# Altium PCB cube.PcbDoc
Units mil, origin at the board's own origin, x right, y up, seen from the top; angles counter-clockwise.
Board outline 3935 x 2100 mil, 2 copper layers (Top Layer, Bottom Layer); 65 components, 66 nets, 289 pads, 196 vias.
Unrouted connection lines stored in the file: 1.
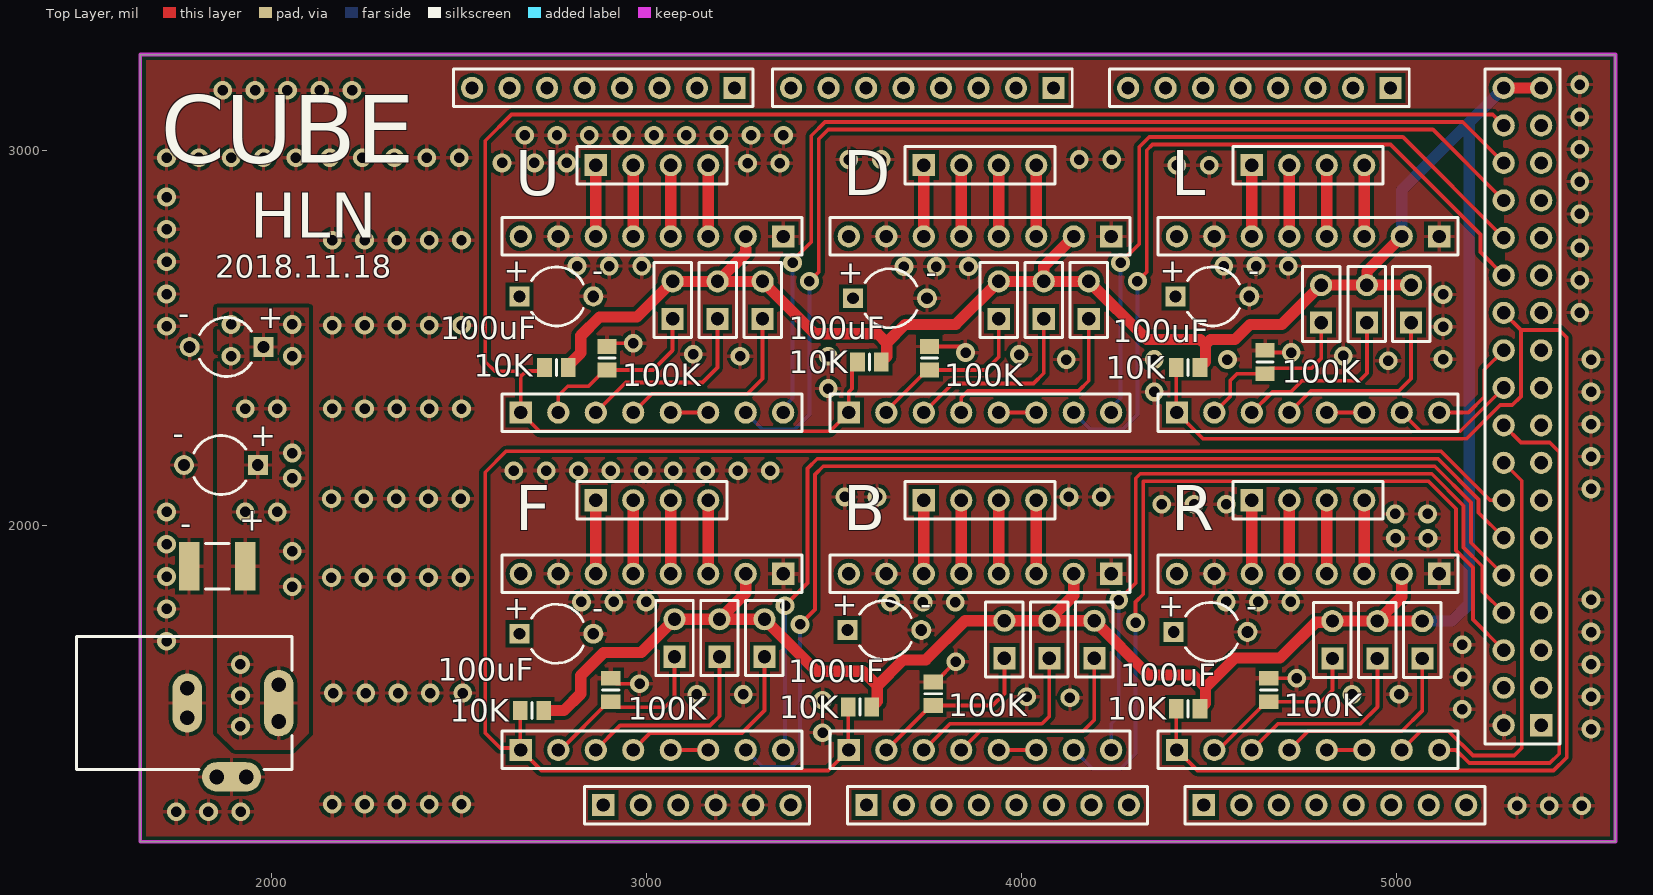
[diagram p0: Top Layer view]
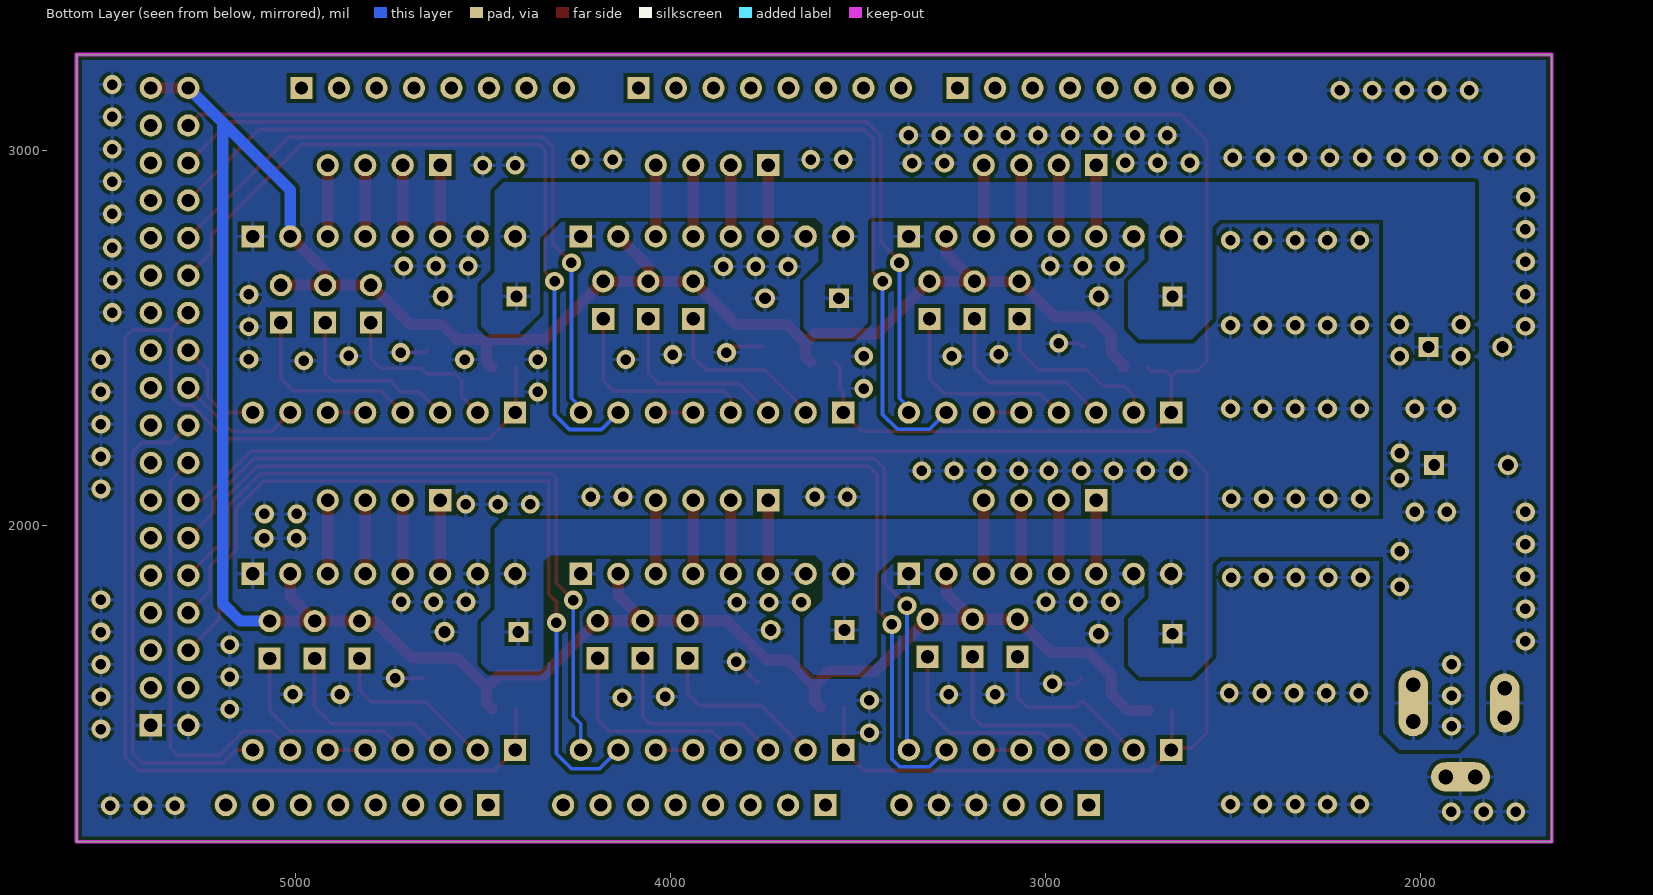
[diagram p1: Bottom Layer view, seen from below]

## Layer stack, top to bottom
Top Solder: solder mask 0.4, Solder Resist, Dk 3.5
Top Layer: signal copper 1.4
Dielectric 1: dielectric 12.6, FR-4, Dk 4.8
Bottom Layer: signal copper 1.4
Bottom Solder: solder mask 0.4, Solder Resist, Dk 3.5

## Board outline
1650,1155 1650,3255 5585,3255 5585,1155

## Design rules (kind name [scope] priority, off if disabled: settings)
Clearance [All] p1: gap=10 ignorepadtopadclearanceinfootprint=FALSE except(0: Arc-Hole Track-Hole SMDPad-Hole THPad-Hole Via-Hole Fill-Hole Poly-Hole Region-Hole Text-Hole)
PolygonConnect [All] p1: connectstyle=Relief reliefconductorwidth=10 reliefentries=4 polygonreliefangle="90 Angle" airgapwidth=10
RoutingVias [All] p1: holewidth=28 width=50 viastyle="Through Hole" minholewidth=28 minwidth=50 maxholewidth=28 maxwidth=50
SolderMaskExpansion [All] p1: expansion=4
Width [All] p1: maxlimit=50 minlimit=10 preferedwidth=10
30 further rules are at their usual default settings.

## Classes and differential pairs
component class cube: C4 C5 C7 C9 J1 P1 P2 P3 P4 P5 P7 P8 P9 P11 P13 P14 P15 P17 P24 P25 P27 P29 P34 P35 P39 P40 P41 P42 P43 RT1 RT2 RT8 RT10 RT11 RT12

## Components (designator, comment, footprint, x,y, rotation, side; value= is the part's Value field where it differs from the comment)
C1 "" CAPR5-4X5 1865,2160 r180 top value=100pF
C2 "" 1812 1855,1890 r180 top value=100pF
C3 "" CAPR5-4X5 2760,2610 r0 top value=100pF
C4 "" CAPR5-4X5 3650,2605 r0 top value=100pF
C5 "" CAPR5-4X5 4510,2610 r0 top value=100pF
C6 "" CAPR5-4X5 1880,2475 r180 top value=100pF
C7 "" CAPR5-4X5 2760,1710 r0 top value=100pF
C8 "" CAPR5-4X5 3635,1720 r0 top value=100pF
C9 "" CAPR5-4X5 4505,1715 r0 top value=100pF
J1 "" KLD-0202 1480,1525 r0 top
P1 "" HDR1X4 2865,2960 r0 top
P2 "" HDR1X4 3740,2960 r0 top
P3 "" HDR1X4 4615,2960 r0 top
P4 "" HDR1X8 3235,3166 r180 top
P5 "" HDR1X6 2885,1253 r0 top
P6 "" HDR1X8 3365,2770 r180 top
P7 "" HDR1X8 4240,2770 r180 top
P8 "" HDR1X8 5115,2770 r180 top
P9 "" HDR1X8 2665,2300 r0 top
P10 "" HDR1X8 3540,2300 r0 top
P11 "" HDR1X8 4415,2300 r0 top
P12 "" HDR1X8 3587,1253 r0 top
P13 "" HDR1X8 4086,3166 r180 top
P14 "" HDR1X2 3310,2550 r90 top
P15 "" HDR1X2 4180,2550 r90 top
P16 "" HDR1X2 5040,2540 r90 top
P17 "" HDR1X2 3070,2550 r90 top
P18 "" HDR1X2 3940,2550 r90 top
P19 "" HDR1X2 4800,2540 r90 top
P20 "" HDR1X2 3190,2550 r90 top
P21 "" HDR1X2 4060,2550 r90 top
P22 "" HDR1X2 4922,2540 r90 top
P23 "" HDR1X8 4487,1253 r0 top
P24 "" HDR1X8 4985,3166 r180 top
P25 "" HDR1X4 2865,2066 r0 top
P26 "" HDR1X4 3740,2066 r0 top
P27 "" HDR1X4 4615,2066 r0 top
P28 "" HDR1X8 3365,1870 r180 top
P29 "" HDR1X8 4240,1870 r180 top
P30 "" HDR1X8 5115,1870 r180 top
P31 "" HDR1X8 2665,1400 r0 top
P32 "" HDR1X8 3540,1400 r0 top
P33 "" HDR1X8 4415,1400 r0 top
P34 "" HDR2X18 5387,1466 r90 top
P35 "" HDR1X2 3315,1648.74 r90 top
P36 "" HDR1X2 4195,1644.74 r90 top
P37 "" HDR1X2 5070,1643.74 r90 top
P38 "" HDR1X2 3075,1648.74 r90 top
P39 "" HDR1X2 3955,1644.74 r90 top
P40 "" HDR1X2 4830,1643.74 r90 top
P41 "" HDR1X2 3195,1648.74 r90 top
P42 "" HDR1X2 4075,1644.74 r90 top
P43 "" HDR1X2 4950,1643.74 r90 top
RT1 "" 6-0805_L 2760,2420 r0 top
RT2 "" 6-0805_L 3595,2435 r0 top
RT3 "" 6-0805_L 4445,2420 r0 top
RT4 "" 6-0805_L 2895,2445 r90 top
RT5 "" 6-0805_L 3755,2445 r90 top
RT6 "" 6-0805_L 4650,2435 r90 top
RT7 "" 6-0805_L 2695,1505 r0 top
RT8 "" 6-0805_L 3570,1515 r0 top
RT9 "" 6-0805_L 4445,1510 r0 top
RT10 "" 6-0805_L 2905,1560 r90 top
RT11 "" 6-0805_L 3765,1550 r90 top
RT12 "" 6-0805_L 4660,1560 r90 top

## Footprints (in the part's own frame and the unit in brackets; to place one, negate y for a bottom-side part, rotate by r counter-clockwise, add the part's x,y. Pads: shape width x height; smd on the part's side, far side on the other; paste and mask are expansions set on the pad)
6-0805_L [mm] "Chip Resistor, Body 2.0x1.2mm, IPC High Density"
  rect 1x1.3 smd: 1(-0.8,0) 2(0.8,0)
  silkscreen extent 0,-0.55 0,0.55, body extent -1.07,-0.7 1.07,0.7, height 0.7
1812 [mm] "Chip Capacitor, Body 4.5x3.2mm, IPC High Density"
  rect 1.4x3.3 smd: 1(-1.9,0) 2(1.9,0)
  silkscreen extent -0.8,-1.55 0.8,1.55, body extent -2.4,-1.7 2.4,1.7, height 1.4
CAPR5-4X5 [mm] "Capacitor; 2 Leads"
  rect 1.35x1.35 hole 0.8: 1(-2.5,0)
  round 1.35 hole 0.8: 2(2.5,0)
  silkscreen extent -1.69,-2 1.82,2
HDR1X2 [mm] "Connector; Header; 2 Position"
  rect 1.5x1.5 hole 0.9: 1(0,0)
  round 1.5 hole 0.9: 2(2.54,0)
  silkscreen extent -1.27,-1.27 3.81,1.27
HDR1X4 [mm] "Connector; Header; 4 Position"
  rect 1.5x1.5 hole 0.9: 1(0,0)
  round 1.5 hole 0.9: 2(2.54,0) 3(5.08,0) 4(7.62,0)
  silkscreen extent -1.27,-1.27 8.89,1.27
HDR1X6 [mm] "Connector; Header; 6 Position"
  rect 1.5x1.5 hole 0.9: 1(0,0)
  round 1.5 hole 0.9: 2(2.54,0) 3(5.08,0) 4(7.62,0) 5(10.16,0) 6(12.7,0)
  silkscreen extent -1.27,-1.27 13.97,1.27
HDR1X8 [mm] "Connector; Header; 8 Position"
  rect 1.5x1.5 hole 0.9: 1(0,0)
  round 1.5 hole 0.9: 2(2.54,0) 3(5.08,0) 4(7.62,0) 5(10.16,0) 6(12.7,0) 7(15.24,0) 8(17.78,0)
  silkscreen extent -1.27,-1.27 19.05,1.27
HDR2X18 [mm] "Connector; Header; 18x2 Position"
  rect 1.5x1.5 hole 0.9: 1(0,0)
  round 1.5 hole 0.9: 2(0,2.54) 3(2.54,0) 4(2.54,2.54) 5(5.08,0) 6(5.08,2.54) 7(7.62,0) 8(7.62,2.54) 9(10.16,0) 10(10.16,2.54) 11(12.7,0) 12(12.7,2.54) 13(15.24,0) 14(15.24,2.54) 15(17.78,0) 16(17.78,2.54) 17(20.32,0) 18(20.32,2.54) 19(22.86,0) 20(22.86,2.54) 21(25.4,0) 22(25.4,2.54) 23(27.94,0) 24(27.94,2.54) 25(30.48,0) 26(30.48,2.54) 27(33.02,0) 28(33.02,2.54) 29(35.56,0) 30(35.56,2.54) 31(38.1,0) 32(38.1,2.54) 33(40.64,0) 34(40.64,2.54) 35(43.18,0) 36(43.18,2.54)
  silkscreen extent -1.27,-1.27 44.45,3.81
KLD-0202 [mm] "DC Power Jack, 2.5mm, KLD Series, PCB Mount"
  oval 2x4.5 all layers, no hole: 1(13.7,0)
  round 1.5 hole 1: 1A(13.7,-1.25) 1B(13.7,1.25) 2A(7.5,-1) 2B(7.5,1) 3A(9.5,-5) 3B(11.5,-5)
  oval 2x4 all layers, no hole: 2(7.5,0)
  oval 4x2 all layers, no hole: 3(10.5,-5)
  silkscreen extent 0,-4.5 14.6,4.5

## Part data
C1 C3 C4 C5 C6 C7 C8 C9: library part Cap2, "Capacitor", PackageDescription="Capacitor; 2 Leads", PackageReference=CAPR5-4X5, Published=23-Sep-2002, Publisher="Altium Limited"
C2: library part "Cap Pol3", "Polarized Capacitor (Surface Mount)", LatestRevisionDate=29-May-2009, LatestRevisionNote="IPC-7351 Footprint Added.", PackageDescription="Chip Capacitor", PackageReference=C0805, Published=8-Jun-2000, Publisher="Altium Limited"
J1: library part PWR2.5, "Low Voltage Power Supply Connector", ComponentLink1Description="Manufacturer Link", ComponentLink1URL=http://domino.kycon.com/internet/Products.html, DatasheetDocument=09-May-2002, Published=17-Dec-2003, Publisher="Altium Limited"
P1 P2 P3 P25 P26 P27: library part "Header 4", "Header, 4-Pin", LatestRevisionDate=17-Jul-2002, LatestRevisionNote="Re-released for DXP Platform.", Publisher="Altium Limited"
P4 P6 P7 P8 P9 P10 P11 P12 P13 P23 P24 P28 P29 P30 P31 P32 P33: library part "Header 8", "Header, 8-Pin", LatestRevisionDate=17-Jul-2002, LatestRevisionNote="Re-released for DXP Platform.", Publisher="Altium Limited"
P5: library part "Header 6", "Header, 6-Pin", LatestRevisionDate=17-Jul-2002, LatestRevisionNote="Re-released for DXP Platform.", Publisher="Altium Limited"
P14 P15 P16 P17 P18 P19 P20 P21 P22 P35 P36 P37 P38 P39 P40 P41 P42 P43: library part "Header 2", "Header, 2-Pin", LatestRevisionDate=17-Jul-2002, LatestRevisionNote="Re-released for DXP Platform.", Publisher="Altium Limited"
P34: library part "Header 18X2", "Header, 18-Pin, Dual row", LatestRevisionDate=17-Jul-2002, LatestRevisionNote="Re-released for DXP Platform.", Publisher="Altium Limited"
RT1 RT2 RT3 RT4 RT5 RT6 RT7 RT8 RT9 RT10 RT11 RT12: library part "Res Thermal", "Thermistor", Code_IPC=RESC2012, LatestRevisionDate=29-May-2009, LatestRevisionNote="IPC-7351 Footprint Added.", PackageDescription="Chip Resistor 0805 Case Size", PackageReference=6-0805, PackageVersion=Mar-2003, Published=24-Mar-1999, Publisher="Altium Limited"

## Via types
v1: diameter 50, hole 28, Top Layer to Bottom Layer, 196 vias

## Nets (pads, with @x,y where several pads share a name; then routed paths per layer and width w, separated by ;. In a path a pad name is that pad's centre, name@x,y a point inside that pad or via, vN(x,y) a via of type N, cw(c..) or ccw(c..) an arc to the next point about the centre after c; other vN are vias at no path point)
12V: C1.1 C2.1 C3.1 C4.1 C5.1 C6.1 C7.1 C8.1 C9.1 J1.1 J1.1A J1.1B P6.8 P7.8 P8.8 P28.8 P29.8 P30.8
  other v1: 1917.21,1463.02 1917.21,1544.54 1917.21,1628.18 2055,1835.47 2055,1930 1929.8,2035 2015,2035 2055,2125 2055,2191.95 1930,2310 2015,2310 1892.24,2450 2055,2450 1892.24,2535 2055,2535
B_DIR: P32.7 P34.6 | length 2242.4
  Top Layer w10: P32.7@4140,1390 P32.7 ; v1(4305,1740) 4305,1795 4325.47,1815.47 4325.47,2116.72 5086.72,2116.72 5160,2043.43 5160,1931.72 5205,1886.72 5205,1748 P34.6
  Bottom Layer w10: P32.7 4190,1350 4265,1350 4305,1390 v1(4305,1740)
B_EN: P31.1 P32.1 P34.14 RT7.1 RT8.1 | length 4743.5
  Top Layer w10: RT7.1 P31.1@2663.5,1401.5 ; RT8.1 3538.5,1401.5 P32.1 3485,1345 2720,1345 P31.1 P31.1@2663.5,1401.5 ; P34.14 5250.57,2066 5119.85,2196.72 2625.72,2196.72 2570,2141 2570,1445 2610,1405 2660,1405 P31.1@2663.5,1401.5
B_STEP: P32.8 P34.8 | length 1996.7
  Top Layer w10: v1(4260,1800) 4305.47,1845.47 4305.47,2125 4317.19,2136.72 5095,2136.72 5180,2051.72 5180,1940 5230,1890 5230,1823 P34.8
  Bottom Layer w10: P32.8 4240,1470 4260,1490 v1(4260,1800)
D_DIR: P10.7 P34.26 | length 2050.9
  Top Layer w10: v1(4310,2650) 4335,2675 4335,3000 4350,3015 4985,3015 5225,2775 5225,2728 P34.26
  Bottom Layer w10: P10.7 4185,2255 4270,2255 4310,2295 v1(4310,2650)
D_EN: P9.1 P10.1 P34.34 RT1.1 RT2.1 | length 4689.2
  Top Layer w10: RT1.1 2719.36,2410.86 2680,2410.86 2665,2395.86 ; RT2.1 3548.82,2420.32 3548.82,2363.82 3540,2355 P10.1 3490,2250 2715,2250 P9.1 2665,2395.86 ; P34.34 5258,3095 2640,3095 2570,3025 2570,2435.86 2595.86,2410 2650.86,2410 2665,2395.86
D_STEP: P10.8 P34.28 | length 1833.8
  Top Layer w10: v1(4265,2700) 4315,2750 4315,3008.28 4341.72,3035 5018,3035 P34.28
  Bottom Layer w10: P10.8 4240,2312.97 4265,2337.97 v1(4265,2700)
F_DIR: P31.7 P34.10 | length 2977.6
  Top Layer w10: v1(3410,1735) 3450,1775 3450,2135 3471.72,2156.72 5103.28,2156.72 5200,2060 5200,1953 P34.10
  Bottom Layer w10: P31.7 3310,1355 3390,1355 3410,1375 v1(3410,1735)
F_STEP: P31.8 P34.12 | length 2753.5
  Top Layer w10: v1(3370,1785) 3430,1845 3430,2151 3455.72,2176.72 5111.57,2176.72 5220,2068.28 5220,2033 P34.12
  Bottom Layer w10: P31.8 3370,1405 v1(3370,1785)
GND: C1.2 C2.2 C3.2 C4.2 C5.2 C6.2 C7.2 C8.2 C9.2 J1.2 J1.2A J1.2B J1.3 J1.3A J1.3B P5.4 P5.5 P6.1 P6.7 P7.1 P7.7 P8.1 P8.7 P28.1 P28.7 P29.1 P29.7 P30.1 P30.7 P34.1 P34.2 RT4.2 RT5.2 RT6.2 RT10.2 RT11.2 RT12.2 | length 489.8
  Top Layer w10: RT4.2 2900.91,2476.5 2909.41,2485 v1(2965,2485) ; RT10.2 2919.68,1576.81 v1(2981.77,1576.81) ; RT5.2 3835,2476.5 v1(3851.5,2460) ; RT11.2 3770.91,1581.5 v1(3825,1635.59) ; RT6.2 4656.5,2460 v1(4720,2460) ; RT12.2 v1(4735,1591.5)
  other v1: 1745.64,1235 1831.89,1235 1918.14,1235 5322.5,1251 5408.75,1251 5495,1251 2161.81,1255 2248.06,1255 2334.31,1255 2420.56,1255 2506.81,1255 3470,1446.25 5520,1455.68 5176.68,1508.46 3470,1532.5 4130,1539.19 4014.51,1541.93 5520,1541.93 3135,1548.19 3258.46,1548.19 4882.47,1548.19 5008,1548.33 2165,1551.85 2251.25,1551.85 2337.5,1551.85 2423.75,1551.85 2510,1551.85 5176.68,1594.71 5520,1628.18 5176.68,1680.96 1720,1690 5520,1714.43 1720,1776.25 3651.33,1794.14 3737.58,1794.14 3823.83,1794.14 2826.6,1795 2912.85,1795 2999.1,1795 4546.5,1795 4632.75,1795 4719,1795 5520,1800.68 2160,1860 2246.25,1860 2332.5,1860 2418.75,1860 2505,1860 1720,1862.5 1720,1948.75 4998.5,1965 5084.75,1965 4997.5,2029.59 5083.75,2029.59 1720,2035 4374.63,2055.68 4460.88,2055.68 4547.13,2055.68 2160,2070 2246.25,2070 2332.5,2070 2418.75,2070 2505,2070 3528.99,2075 3615.24,2075 4127.21,2075 4213.46,2075 5520,2096.42 2646.34,2145 2732.59,2145 2818.84,2145 2905.09,2145 2991.34,2145 3071.62,2145 3157.87,2145 3244.12,2145 3330.37,2145 5520,2182.67 5520,2268.92 2161.81,2310.32 2248.06,2310.32 2334.31,2310.32 2420.56,2310.32 2506.81,2310.32 4355,2355.17 5520,2355.17 3485,2364.11 4978.67,2438.48 4120.07,2441.42 4355,2441.42 4550,2441.42 5520,2441.42 5125.32,2442.5 3250,2450.36 3485,2450.36 4859.01,2451.04 3994.53,2454.84 3125,2455.59 5125.32,2528.75 1720,2530 2161.81,2532.79 2248.06,2532.79 2334.31,2532.79 2420.56,2532.79 2506.81,2532.79 5490,2566.69 5125.32,2615 1720,2616.25 5490,2652.94 3687,2689.42 3773.25,2689.42 3859.5,2689.42 2815,2690.86 2901.25,2690.86 2987.5,2690.86 4540,2690.86 4626.25,2690.86 4712.5,2690.86 1720,2702.5 5490,2739.19 2161.81,2760 2248.06,2760 2334.31,2760 2420.56,2760 2506.81,2760 1720,2788.75 5490,2830 1720,2875 5490,2916.25 4415,2960 4501.25,2960 3270,2965 3356.25,2965 2615.07,2966 2701.32,2966 2787.57,2966 3540,2975 3626.25,2975 4155,2975 4241.25,2975 1720,2980 1806.25,2980 1892.5,2980 1978.75,2980 2065,2980 2155.47,2980 2241.72,2980 2327.97,2980 2414.22,2980 2500.47,2980 5490,3002.5 2675.32,3040 2761.57,3040 2847.82,3040 2934.07,3040 3020.32,3040 3106.81,3040 3193.06,3040 3279.31,3040 3365.56,3040 5490,3088.75 1870,3160 1956.25,3160 2042.5,3160 2128.75,3160 2215,3160 5490,3175
L_DIR: P11.7 P34.20 | length 340.8
  Top Layer w10: P11.7 5065,2250 5171,2250 P34.20
L_EN: P11.1 P33.1 P34.24 RT3.1 RT9.1 | length 3794.7
  Top Layer w10: RT9.1 4413.5,1401.5 P33.1 4470,1345 5420,1345 5455,1380 5455,2500 5435,2520 5333,2520 ; RT3.1 4413.5,2301.5 4485,2230 5188.03,2230 5278.03,2320 5310,2320 5333,2343 5333,2520 ; P34.24 5333,2520
L_STEP: P11.8 P34.22 | length 282.8
  Top Layer w10: P11.8 5192.72,2300 5235,2342.28 5235,2414 P34.22
NetP1_1: P1.1 P6.6 | length 190
  Top Layer w30: P6.6 P1.1
NetP1_2: P1.2 P6.5 | length 190
  Top Layer w30: P6.5 P1.2
NetP1_3: P1.3 P6.4 | length 190
  Top Layer w30: P6.4 P1.3
NetP1_4: P1.4 P6.3 | length 190
  Top Layer w30: P6.3 P1.4
NetP2_1: P2.1 P7.6 | length 190
  Top Layer w30: P7.6 P2.1
NetP2_2: P2.2 P7.5 | length 190
  Top Layer w30: P7.5 P2.2
NetP2_3: P2.3 P7.4 | length 190
  Top Layer w30: P7.4 P2.3
NetP2_4: P2.4 P7.3 | length 190
  Top Layer w30: P7.3 P2.4
NetP3_1: P3.1 P8.6 | length 190
  Top Layer w30: P8.6 P3.1
NetP3_2: P3.2 P8.5 | length 190
  Top Layer w30: P8.5 P3.2
NetP3_3: P3.3 P8.4 | length 190
  Top Layer w30: P8.4 P3.3
NetP3_4: P3.4 P8.3 | length 190
  Top Layer w30: P8.3 P3.4
NetP9_2: P9.2 P17.1 RT4.1 | length 484.1
  Top Layer w10: P9.2 2765,2345 2790,2370 2845.59,2370 2889.09,2413.5 RT4.1 3017.5,2413.5 3070,2466 P17.1
NetP9_3: P9.3 P20.1 | length 504.7
  Top Layer w10: P9.3 2945,2380 3150,2380 3190,2420 P20.1
NetP9_4: P9.4 P14.1 | length 542.3
  Top Layer w10: P9.4 3015,2350 3270,2350 3310,2390 P14.1
NetP9_5: P9.5 P9.6 | length 100
  Top Layer w10: P9.5 P9.6
NetP10_2: P10.2 P18.1 RT5.1 | length 465.6
  Top Layer w10: P10.2 3640,2304.41 3749.09,2413.5 RT5.1 3905,2413.5 3940,2448.5 P18.1
NetP10_3: P10.3 P21.1 | length 508.5
  Top Layer w10: P10.3 3817.5,2377.5 4032.5,2377.5 4060,2405 P21.1
NetP10_4: P10.4 P15.1 | length 563.6
  Top Layer w10: P10.4 3840,2340 3857.5,2357.5 4152.5,2357.5 4180,2385 P15.1
NetP10_5: P10.5 P10.6 | length 100
  Top Layer w10: P10.5 P10.6
NetP11_2: P11.2 P19.1 RT6.1 | length 465.5
  Top Layer w10: P11.2 4557.62,2342.62 4557.62,2385.27 4575.86,2403.5 RT6.1 4664.69,2418.19 4774.05,2418.19 4800,2444.14 P19.1
NetP11_3: P11.3 P22.1 | length 485.5
  Top Layer w10: P11.3 4670,2355 4719,2355 4749,2385 4902,2385 4922,2405 P22.1
NetP11_4: P11.4 P16.1 | length 512.3
  Top Layer w10: P11.4 4773,2358 5008,2358 5040,2390 P16.1
NetP11_5: P11.5 P11.6 | length 100
  Top Layer w10: P11.5 P11.6
NetP25_1: P25.1 P28.6 | length 196
  Top Layer w30: P28.6 P25.1
NetP25_2: P25.2 P28.5 | length 196
  Top Layer w30: P28.5 P25.2
NetP25_3: P25.3 P28.4 | length 196
  Top Layer w30: P28.4 P25.3
NetP25_4: P25.4 P28.3 | length 196
  Top Layer w30: P28.3 P25.4
NetP26_1: P26.1 P29.6 | length 196
  Top Layer w30: P29.6 P26.1
NetP26_2: P26.2 P29.5 | length 196
  Top Layer w30: P29.5 P26.2
NetP26_3: P26.3 P29.4 | length 196
  Top Layer w30: P29.4 P26.3
NetP26_4: P26.4 P29.3 | length 196
  Top Layer w30: P29.3 P26.4
NetP27_1: P27.1 P30.6 | length 196
  Top Layer w30: P30.6 P27.1
NetP27_2: P27.2 P30.5 | length 196
  Top Layer w30: P30.5 P27.2
NetP27_3: P27.3 P30.4 | length 196
  Top Layer w30: P30.4 P27.3
NetP27_4: P27.4 P30.3 | length 196
  Top Layer w30: P30.3 P27.4
NetP31_2: P31.2 P38.1 RT10.1 | length 488.9
  Top Layer w10: P31.2 2770.59,1400 2899.09,1528.5 RT10.1 2919.68,1513.82 3048.82,1513.82 3075,1540 P38.1
NetP31_3: P31.3 P41.1 | length 526
  Top Layer w10: P31.3 2930,1465 3170,1465 3195,1490 P41.1
NetP31_4: P31.4 P35.1 | length 537.2
  Top Layer w10: P31.4 3010,1445 3255,1445 3315,1505 P35.1
NetP31_5: P31.5 P31.6 | length 100
  Top Layer w10: P31.5 P31.6
NetP32_2: P32.2 P39.1 RT11.1 | length 471.9
  Top Layer w10: P32.2 3640.59,1400 3759.09,1518.5 RT11.1 3923.5,1518.5 3955,1550 P39.1
NetP32_3: P32.3 P42.1 | length 527
  Top Layer w10: P32.3 3810,1470 4055,1470 4075,1490 P42.1
NetP32_4: P32.4 P36.1 | length 552.9
  Top Layer w10: P32.4 3890,1450 4165,1450 4195,1480 P36.1
NetP32_5: P32.5 P32.6 | length 100
  Top Layer w10: P32.5 P32.6
NetP33_2: P33.2 P40.1 RT12.1 | length 465.5
  Top Layer w10: P33.2 4525.59,1400 4654.09,1528.5 RT12.1 4799.36,1528.5 4830,1559.14 P40.1
NetP33_3: P33.3 P43.1 | length 511.4
  Top Layer w10: P33.3 4685,1470 4905,1470 4950,1515 P43.1
NetP33_4: P33.4 P37.1 | length 537.2
  Top Layer w10: P33.4 4765,1450 5015,1450 5070,1505 P37.1
NetP33_5: P33.5 P33.6 | length 100
  Top Layer w10: P33.5 P33.6
R_DIR: P33.7 P34.16 | length 1156.8
  Top Layer w10: P33.7 5065,1450 5140,1450 5205,1385 5315,1385 5335,1405 5335,2118 P34.16
R_STEP: P33.8 P34.18 | length 1327.3
  Top Layer w10: P33.8 5160,1400 5195,1365 5410,1365 5435,1390 5435,2195 5410,2220 5333,2220 P34.18
U_DRI: P9.7 P34.30 | length 2865.8
  Top Layer w10: v1(3435,2650) 3460,2675 3460,3030 3485,3055 5098,3055 P34.30
  Bottom Layer w10: P9.7 3309.53,2255.47 3395.47,2255.47 3435,2295 v1(3435,2650)
U_STEP: P9.8 P34.32 | length 2676.7
  Top Layer w10: v1(3390,2700) 3390,2705 3440,2755 3440,3038.28 3476.72,3075 5178,3075 P34.32
  Bottom Layer w10: P9.8 3365,2312.97 3390,2337.97 v1(3390,2700)
VCC: P5.3 P6.2 P7.2 P8.2 P14.2 P15.2 P16.2 P17.2 P18.2 P19.2 P20.2 P21.2 P22.2 P28.2 P29.2 P30.2 P34.35 P34.36 P35.2 P36.2 P37.2 P38.2 P39.2 P40.2 P41.2 P42.2 P43.2 RT1.2 RT2.2 RT3.2 RT7.2 RT8.2 RT9.2 | length 8602.3
  Top Layer w30: RT7.2 2780,1505 2825,1550 2825,1598.74 2886.26,1660 2986.26,1660 P38.2 P41.2 ; RT1.2 2791.5,2425.91 2825,2459.41 2825,2505 2875,2555 2975,2555 P17.2 P20.2 ; P28.2@3258.46,1863.46 P28.2 3265,1818.74 P41.2 ; 3265,2737.5 3265,2725 P20.2 ; RT8.2 3616.18,1529.68 3616.18,1571.18 ; RT2.2 3641.18,2449.68 3641.18,2486.18 ; P29.2 4140,1812.71 4075,1747.71 P42.2 ; P7.2 4060,2690 P21.2 ; RT9.2 4491.18,1524.68 4491.18,1566.18 ; RT3.2 4491.18,2434.68 4491.18,2481.18 ; P30.2 5015,1808.74 P43.2 ; P8.2 4922,2677 P22.2 ; P16.2 P22.2 ; P37.2 P43.2 ; P34.36 P34.35 ; P20.2 P14.2 3450,2510 3617.36,2510 3641.18,2486.18 ; P41.2 P35.2 3453.74,1610 3577.36,1610 3616.18,1571.18 ; 3616.18,1571.18 3685,1640 3745,1640 3849.74,1744.74 P39.2 P42.2 ; 3641.18,2486.18 3690,2535 3825,2535 P18.2 P21.2 ; P21.2 P15.2 4335,2495 4477.36,2495 4491.18,2481.18 ; P42.2 P36.2 4339.74,1600 4457.36,1600 4491.18,1566.18 ; 4491.18,1566.18 4570,1645 4690,1645 4785.47,1740.47 4826.73,1740.47 P40.2 P43.2 ; 4491.18,2481.18 4505,2495 4570,2495 4610,2535 4695,2535 P19.2 P22.2
  Bottom Layer w30: P8.2 5015,2894 5195,3074 ; P37.2 5148.74,1743.74 5195,1790 5195,3074 ; P34.36 5195,3074
pads on no net: P4.1 P4.2 P4.3 P4.4 P4.5 P4.6 P4.7 P4.8 P5.1 P5.2 P5.6 P12.1 P12.2 P12.3 P12.4 P12.5 P12.6 P12.7 P12.8 P13.1 P13.2 P13.3 P13.4 P13.5 P13.6 P13.7 P13.8 P23.1 P23.2 P23.3 P23.4 P23.5 P23.6 P23.7 P23.8 P24.1 P24.2 P24.3 P24.4 P24.5 P24.6 P24.7 P24.8 P34.3 P34.4 P34.5 P34.7 P34.9 P34.11 P34.13 P34.15 P34.17 P34.19 P34.21 P34.23 P34.25 P34.27 P34.29 P34.31 P34.33

## Polygon pours and split planes (outlines as drawn)
GND on Bottom Layer "Bottom Layer-GND" (solid, pour order 12): 1650,3255 5585,3255 5585,1155 1650,1155
12V on Bottom Layer "Bottom Layer-12V 2" (solid, pour order 10): 2100,2915 2100,1445 2055,1400 1900,1400 1855,1445 1855,2915
12V on Bottom Layer "Bottom Layer-12V 1" (solid, pour order 0): 2100,2015 4445,2015 4470,1990 4470,1775 4505,1740 4505,1630 4485,1610 4350,1610 4300,1660 4300,1890 4270,1920 3615,1920 3595,1900 3595,1800 3645,1750 3645,1625 3620,1600 3500,1600 3450,1650 3450,1870 3400,1920 2745,1920 2725,1900 2725,1805 2780,1750 2780,1625 2750,1595 2610,1595 2555,1650 2555,1895 2535,1915 2100,1915
12V on Bottom Layer "Bottom Layer-12V" (solid, pour order 2): 2100,2915 4445,2915 4470,2890 4470,2675 4505,2640 4505,2530 4485,2510 4405,2510 4350,2565 4350,2765 4295,2820 3615,2820 3595,2800 3595,2700 3645,2650 3645,2525 3620,2500 3515,2500 3475,2540 3475,2810 3465,2820 2745,2820 2725,2800 2725,2705 2780,2650 2780,2525 2750,2495 2610,2495 2555,2550 2555,2795 2535,2815 2100,2815
GND on Top Layer "Top Layer-GND" (solid, pour order 16): 1650,3255 5585,3255 5585,1155 1650,1155
12V on Top Layer "Top Layer-12V" (solid, pour order 14): 1855,2580 2100,2580 2100,1445 2055,1400 1901.5,1400 1856.5,1445 1855,1445

## Keep-outs
Keep-Out Layer:
  the board outline again, w10

## Other copper
Top Layer:
  pour cut-out: 1771.95,1215.07
  pour cut-out: 5283.3,3068.9 5290,2675 5001.75,3017.51 4980.47,3057.4 5018.07,3095 5250,3095
  pour cut-out: 2661.57,2295 2706.57,2250 3015,2250 3036.81,2271.81 3036.81,2363.19 3000.81,2399.19 2668.33,2399.19 2665,2395.86
  pour cut-out: 2930,1465 2865,1400 2865,1350 2870,1345 2980,1345 2980,1430 3015,1465
  pour cut-out: 4685,1470 4625,1410 4625,1345.32 4630.32,1340 5075,1340 5080,1345 5080,1403.02 5033.02,1450
  pour cut-out: 5348.81,1231.07
  pour cut-out: 5095,2230 5180,2145 5180,1914.19 5214.19,1880 5214.19,1738.81 5297.32,1655.68 5375,1655.68 5445.81,1726.5 5445.81,2509.19 5440,2515 5345,2515 5306.93,2476.93 5306.93,2385.93 5155,2234 5155,2230
  pour cut-out: 5345,1445 5345,1415 5320.81,1390.81 5320.81,1375 5410,1375 5435,1400 5435,1450
Bottom Layer:
  pour cut-out: 4270,1919.75 4322.5,1919.75 4340,1902.25 4340,1619.75 4300,1659.75 4300,1889.75

## Silkscreen, mask and mechanical layers (free items; w line width, h text height)
Top Overlay:
  text "CUBE" at 1705,2966 h180
  text "U" at 2650,2880 h120
  text "D" at 3525,2880 h120
  text "L" at 4400,2880 h120
  text "HLN" at 1943.43,2766 h120
  text "2018.11.18" at 1850,2660 h60
  text "+" at 2620,2650 h60
  text "+" at 4370,2650 h60
  text "-" at 2855,2648.74 h60
  text "-" at 4605,2648.74 h60
  text "+" at 3510,2645 h60
  text "-" at 3745,2643.74 h60
  text "-" at 1751.57,2533.74 h60
  text "+" at 1963.43,2525 h60
  text "100uF" at 2450,2495 h60
  text "100uF" at 3380,2495 h60
  text "100uF" at 4243.43,2487 h60
  text "10K" at 3380,2405 h60
  text "10K" at 2540,2395 h60
  text "10K" at 4225,2390 h60
  text "100K" at 4695,2380 h60
  text "100K" at 2936,2370 h60
  text "100K" at 3795,2370 h60
  text "-" at 1736.57,2213.74 h60
  text "+" at 1943.43,2210 h60
  text "F" at 2650,1986 h120
  text "B" at 3525,1986 h120
  text "R" at 4400,1986 h120
  text "+" at 1913.43,1985 h60
  text "-" at 1756.57,1973.74 h60
  text "+" at 3495,1760 h60
  text "-" at 3730,1758.74 h60
  text "+" at 4365,1755 h60
  text "-" at 4600,1753.74 h60
  text "+" at 2620,1750 h60
  text "-" at 2855,1748.74 h60
  text "100uF" at 2443.43,1585 h60
  text "100uF" at 3378.43,1580 h60
  text "100uF" at 4263.43,1570 h60
  text "100K" at 3805,1490 h60
  text "100K" at 4700,1490 h60
  text "10K" at 3355,1485 h60
  text "100K" at 2950,1480 h60
  text "10K" at 4230,1480 h60
  text "10K" at 2475,1475 h60